# Altium PCB MAX51.PcbDoc (part 1 of 3)
Units mil, origin at the board's own origin, x right, y up, seen from the top; angles counter-clockwise.
Board outline 4625 x 3470 mil, 2 copper layers (Top Layer, Bottom Layer); 152 components, 205 nets, 817 pads, 224 vias.
Unrouted connection lines stored in the file: 41.
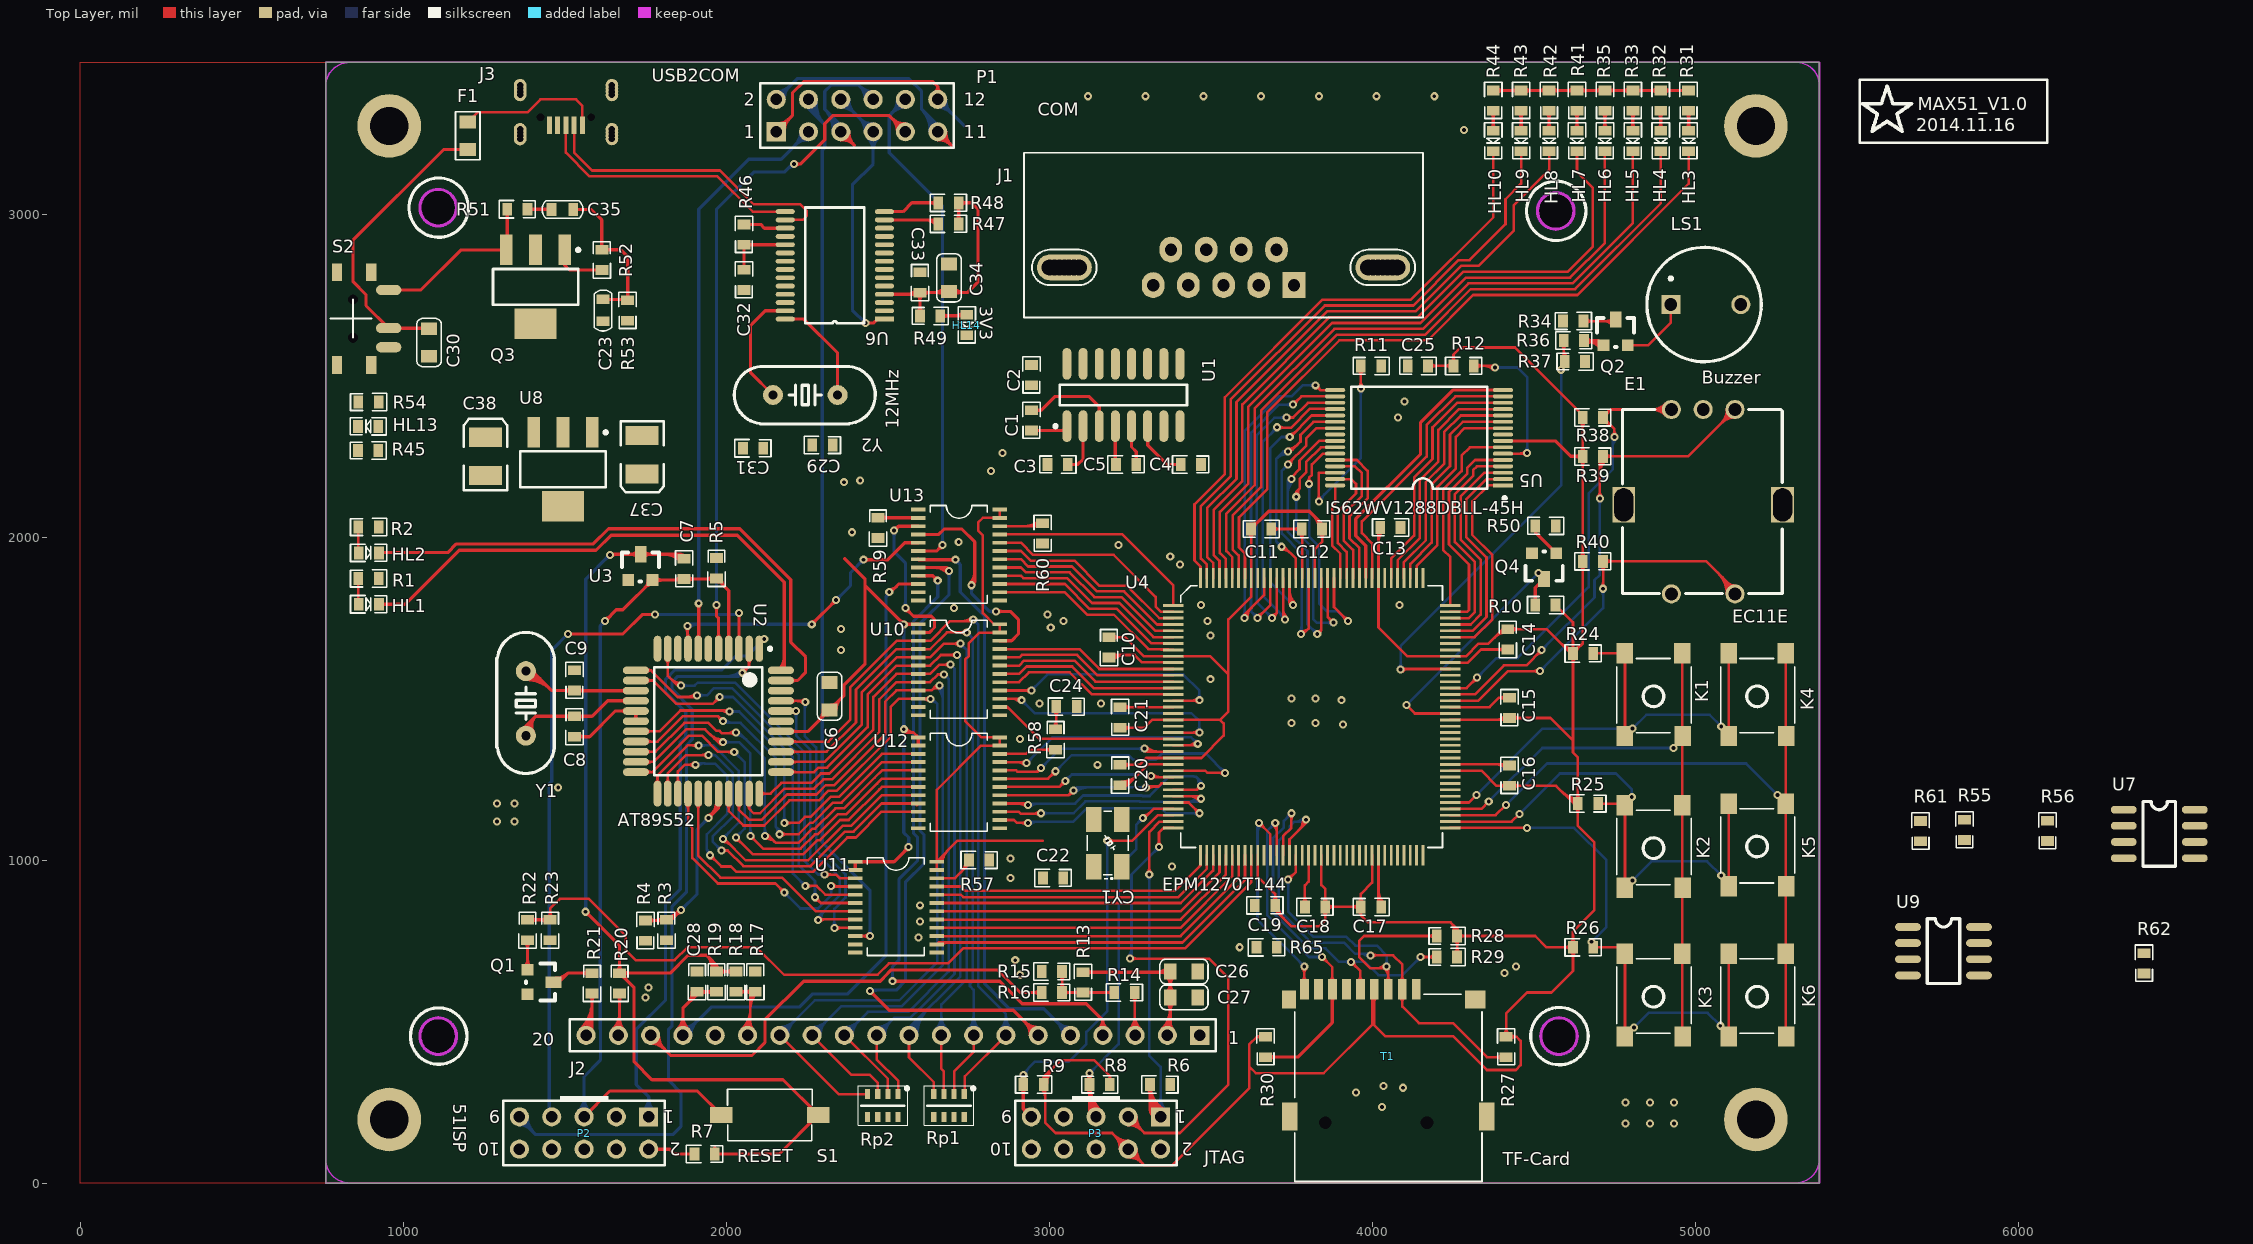
[diagram p0: Top Layer view]
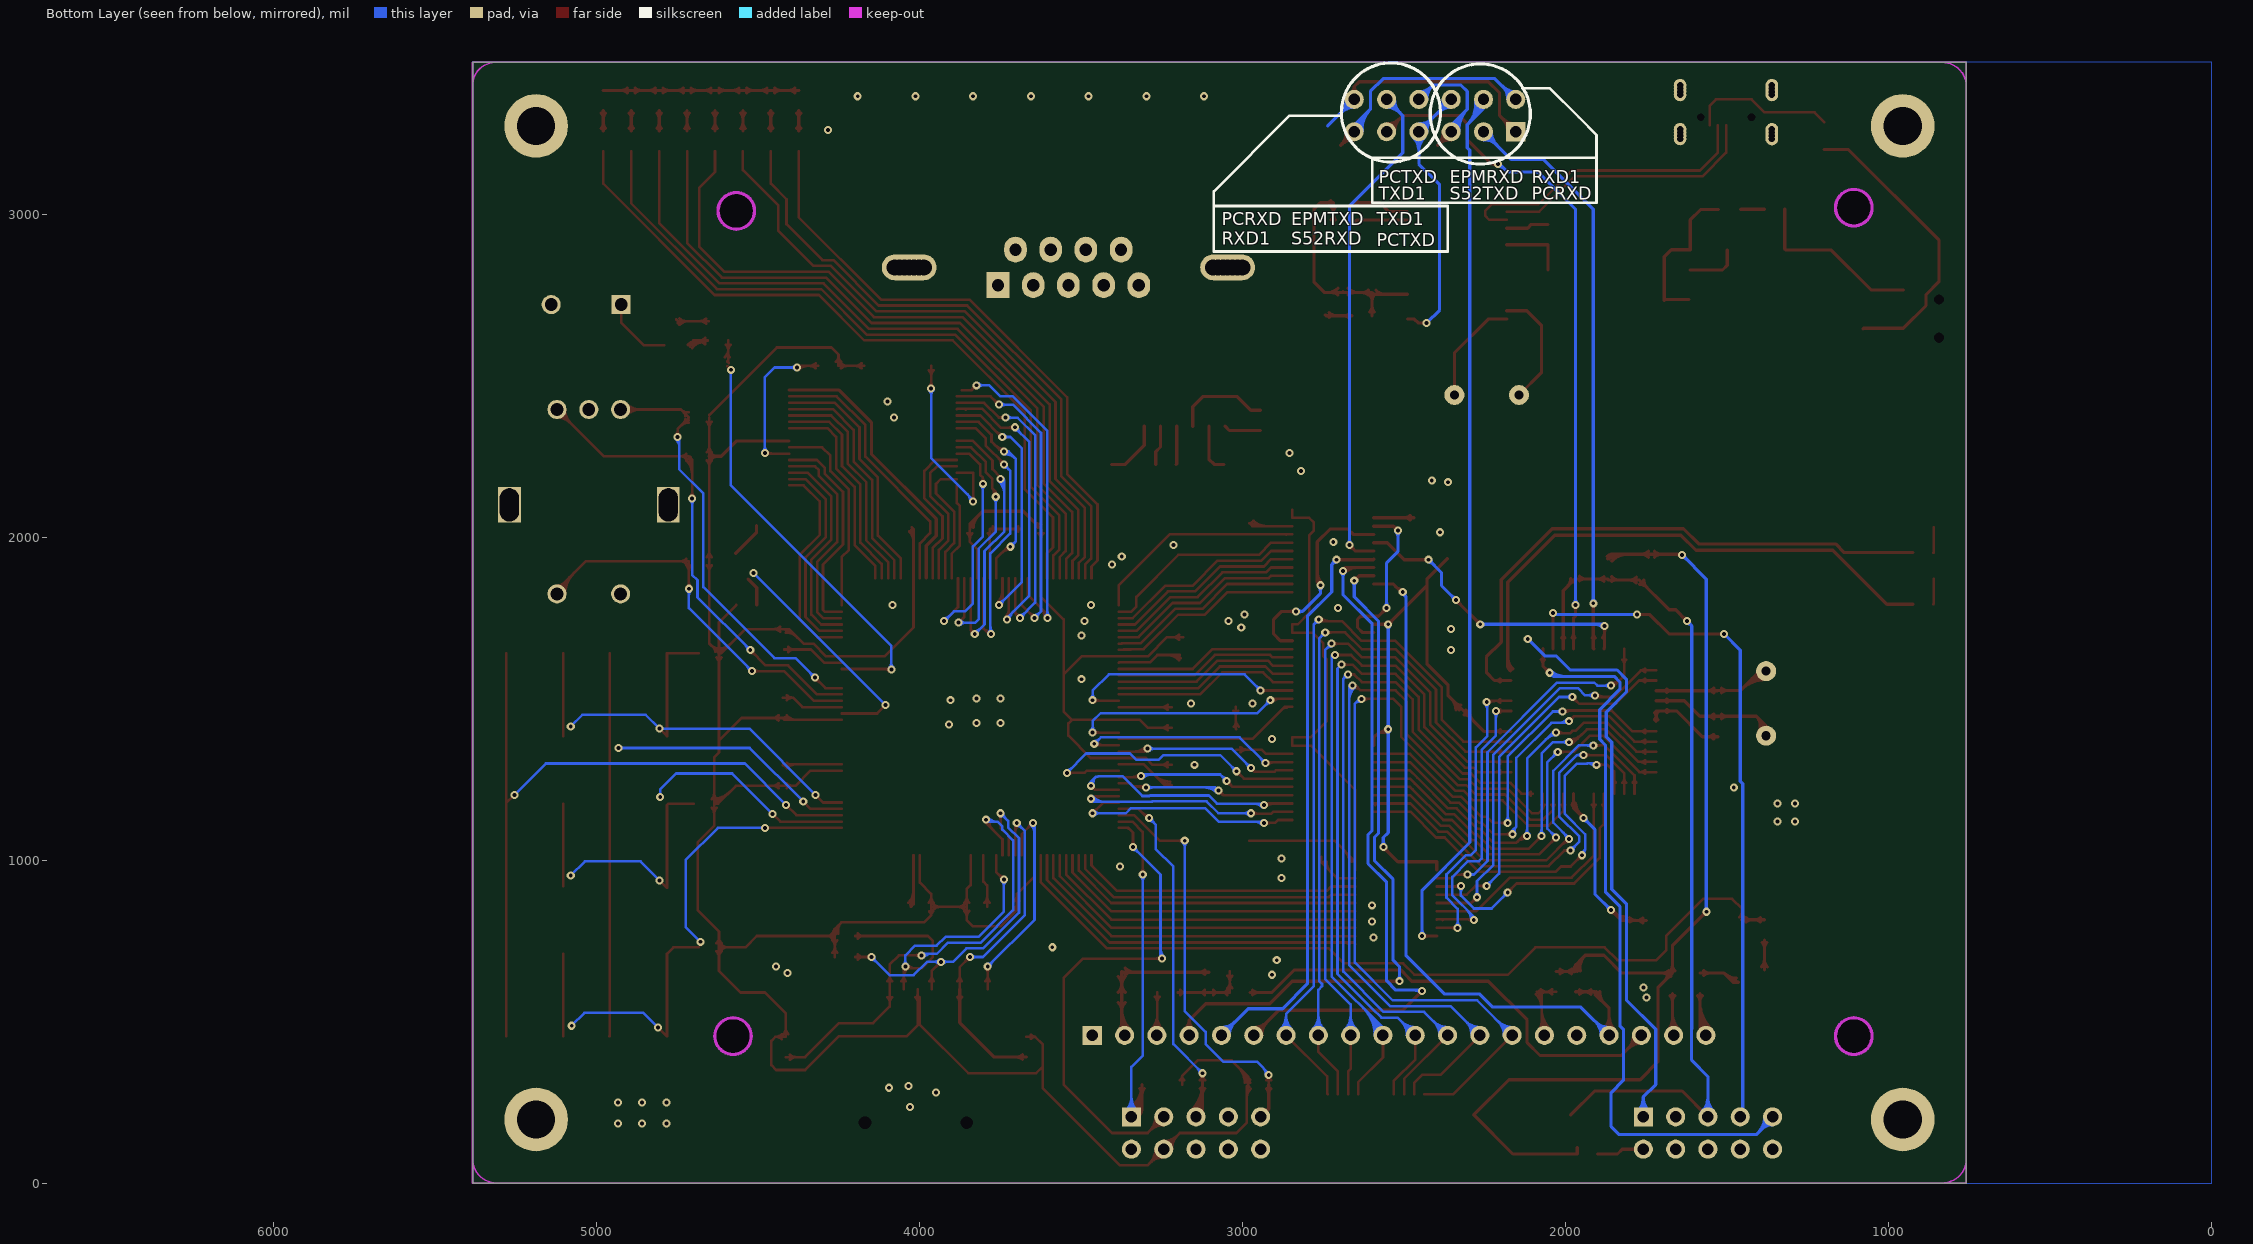
[diagram p1: Bottom Layer view, seen from below]
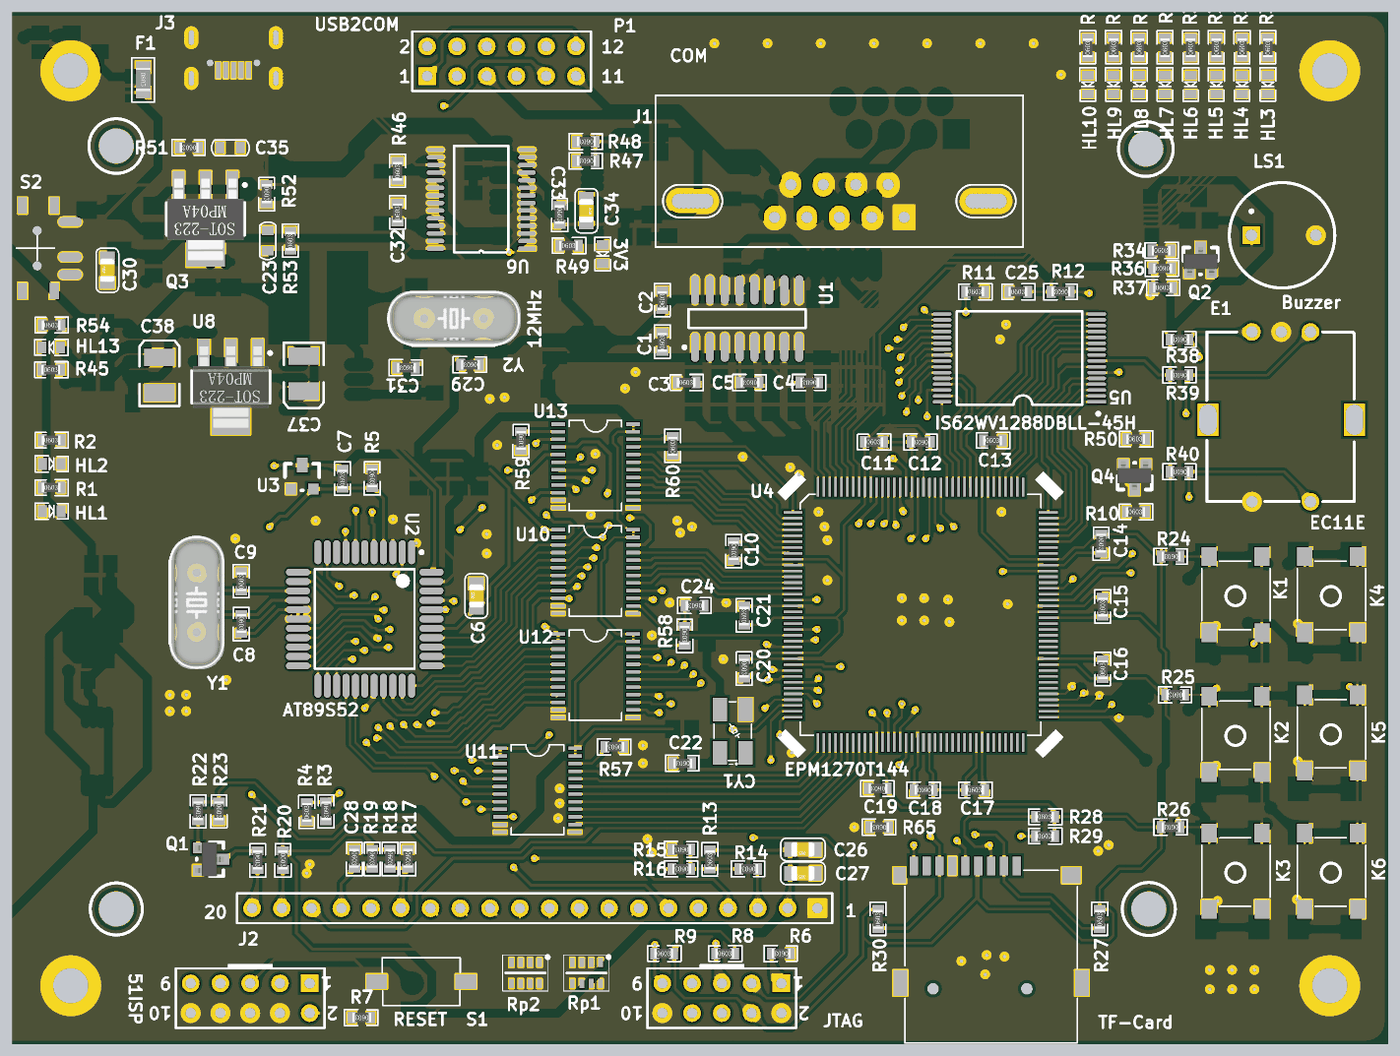
[diagram p4: 3D render of the assembled board from above, using the file's embedded part models]

## Layer stack, top to bottom
Top Layer: signal copper 1.4
Dielectric: dielectric 12.6, FR-4, Dk 4.8
Bottom Layer: signal copper 1.4

## Board outline
760,0 760,3470 5385,3470 5385,0

## Design rules (kind name [scope] priority, off if disabled: settings)
Clearance Clearance_4 [InComponent('J3')] p1: gap=7.87
Clearance Clearance_3 [InComponent('Q3')] p2: gap=7
Clearance Clearance_2 [InComponent('U5')] p3: gap=7
Clearance Clearance_1 [InComponent('U2')] p4: gap=7
Clearance [All] p5: gap=10
ComponentClearance ComponentClearance_1 [InComponent('J2')] p1: gap=0 collisioncheckmode=3 verticalgap=0 showdistances=FALSE
ComponentClearance [All] p2: gap=10 collisioncheckmode=3 verticalgap=10 showdistances=FALSE
DiffPairsRouting [All] p1: maxlimit=10 minlimit=10 mostfreqgap=10 maxuncoupledlength=500
PolygonConnect PolygonConnect_1 [InNet('GND') vs InNet('GND')] p1: connectstyle=Direct reliefconductorwidth=10 reliefentries=4 polygonreliefangle="90 Angle"
PolygonConnect [All] p2: connectstyle=Relief reliefconductorwidth=10 reliefentries=4 polygonreliefangle="90 Angle"
RoutingVias [All] p1: holewidth=15 width=25 viastyle="Through Hole" minholewidth=12 minwidth=20 maxholewidth=28 maxwidth=50
SilkscreenOverComponentPads [All] p1: minsilkscreentomaskgap=10
SolderMaskExpansion [All] p1: expansion=4
Width [All] p1: maxlimit=20 minlimit=8 preferedwidth=10
25 further rules are at their usual default settings.

## Classes and differential pairs
component class EEPROM: R55 R56 R61 R62 U7 U9
component class POWER: C23 C29 C30 C31 C32 C33 C34 C35 C37 C38 F1 HL13 HL14 J3 Q3 R45 R46 R47 R48 R49 R51 R52 R53 R54 S2 U6 U8 Y2
component class Transceiver: R57 R58 R59 R60 U10 U11 U12 U13
net class V3_AD[7..0]: V3_AD0 V3_AD1 V3_AD2 V3_AD3 V3_AD4 V3_AD5 V3_AD6 V3_AD7
net class V3_A[15..8]: V3_A8 V3_A9 V3_A10 V3_A11 V3_A12 V3_A13 V3_A14 V3_A15
net class DATA[7..0]: DATA0 DATA1 DATA2 DATA3 DATA4 DATA5 DATA6 DATA7
net class ADDR[16..0]: ADDR0 ADDR1 ADDR2 ADDR3 ADDR4 ADDR5 ADDR6 ADDR7 ADDR8 ADDR9 ADDR10 ADDR11 ADDR12 ADDR13 ADDR14 ADDR15 ADDR16
net class AD[7..0]: AD0 AD1 AD2 AD3 AD4 AD5 AD6 AD7
net class A[15..8]: A8 A9 A10 A11 A12 A13 A14 A15
component class SRAM: C25 R11 R12 U5
component class MCU: C1 C2 C3 C4 C5 C6 C7 C8 C9 HL1 HL2 J1 P1 P2 R1 R2 R3 R4 R5 R7 S1 U1 U2 U3 Y1
component class LCM12864&&JM320240: C26 C27 C28 J2 Q1 R13 R14 R15 R16 R17 R18 R19 R20 R21 R22 R23 Rp1 Rp2
component class KEY&&SD: E1 HL3 HL4 HL5 HL6 HL7 HL8 HL9 HL10 K1 K2 K3 K4 K5 K6 LS1 Q2 R24 R25 R26 R27 R28 R29 R30 R31 R32 R33 R34 R35 R36 R37 R38 R39 R40 R41 R42 R43 R44 R65 T1
component class EPM1270: C10 C11 C12 C13 C14 C15 C16 C17 C18 C19 C20 C21 C22 C24 CY1 P3 Q4 R6 R8 R9 R10 R50 U4
net class NLED[8..1]: NLED1 NLED2 NLED3 NLED4 NLED5 NLED6 NLED7 NLED8
differential pair D: +D_P -D_N

## Components (designator, comment, footprint, x,y, rotation, side; value= is the part's Value field where it differs from the comment)
C1 "100nF" R0603 2945,2330 r90 top
C2 "100nF" R0603 2945,2470 r90 top
C3 "100nF" R0603 2995,2225 r0 top
C4 "100nF" R0603 3470,2225 r180 top
C5 "100nF" R0603 3270,2225 r180 top
C6 "10uF/16V" C0805 2320,1465 r90 top
C7 "100nF" R0603 1870,1870 r90 top
C8 "30pF" R0603 1530,1445 r270 top
C9 "30pF" R0603 1530,1525 r90 top
C10 "100nF" R0603 3185,1690 r270 top
C11 "100nF" R0603 3625,2025 r0 top
C12 "100nF" R0603 3845,2025 r180 top
C13 "100nF" R0603 4025,2030 r0 top
C14 "100nF" R0603 4420,1715 r270 top
C15 "100nF" R0603 4425,1440 r90 top
C16 "100nF" R0603 4425,1230 r90 top
C17 "100nF" R0603 3965,855 r0 top
C18 "100nF" R0603 3855,855 r180 top
C19 "100nF" R0603 3700,860 r180 top
C20 "100nF" R0603 3220,1295 r270 top
C21 "100nF" R0603 3220,1410 r90 top
C22 "100nF" R0603 3044,945 r180 top
C23 "100nF" C0603 1615,2735 r270 top
C24 "100nF" R0603 3085,1475 r180 top
C25 "100nF" R0603 4110,2530 r0 top
C26 "22uF/25V" C0805 3460,655 r180 top
C27 "22uF/25V" C0805 3460,575 r180 top
C28 "100nF" R0603 1910,655 r270 top
C29 "20P" R0603 2330,2285 r180 top
C30 "1uF/16V" C0805 1080,2560 r90 top
C31 "20P" R0603 2115,2275 r180 top
C32 "100nF" R0603 2055,2765 r90 top
C33 "100nF" R0603 2600,2820 r270 top
C34 "100nF" C0805 2690,2845 r270 top
C35 "1uF" C0603 1460,3010 r0 top
C37 "22uf/6.3V" B-3528 1740,2255 r270 top
C38 "10uf/6.3V" B-3528 1255,2250 r90 top
CY1 "40MHz" XCY4_5032 3225,980 r90 top
E1 "EC11E" EC11E 5025,2395 r180 top
F1 "Fuse 1" R0805 1200,3285 r270 top
HL1 "LED" LED_0603 925,1792 r180 top
HL2 "LED" LED_0603 925,1951.33 r180 top
HL3 "LED" LED_0603 4980,3195 r90 top
HL4 "LED" LED_0603 4893.57,3195 r90 top
HL5 "LED" LED_0603 4807.14,3195 r90 top
HL6 "LED" LED_0603 4720.71,3195 r90 top
HL7 "LED" LED_0603 4634.29,3195 r90 top
HL8 "LED" LED_0603 4547.86,3195 r90 top
HL9 "LED" LED_0603 4461.43,3195 r90 top
HL10 "LED" LED_0603 4375,3195 r90 top
HL13 "LED" LED_0603 860,2343 r0 top
HL14 "LED" LED_0603 2745,2625 r90 top
J1 "DB9M" DB9/M 3540,2780 r0 top
J2 "LCM12864" LCD12864 1015,3115 r0 top locked
J3 "Micro-B USB" "Micro-B  USB1" 1555,3275 r180 top locked
K1 "KEY" KEY3 4961,1384 r90 top
K2 "KEY" KEY3 4961,914 r90 top
K3 "KEY" KEY3 4961,454 r90 top
K4 "KEY" KEY3 5282,1384 r90 top
K5 "KEY" KEY3 5282,919 r90 top
K6 "KEY" KEY3 5282,454 r90 top
LS1 "Speaker" SPK1 4925,2720 r0 top locked
P1 "Header 6X2" HDR2X6 2155,3255 r0 top locked
P2 "USP_ISP" HDR2X5 1760,205 r180 top locked
P3 "Header 5X2" HDR2X5 3345,205 r180 top locked
Q1 "MMBT3904W" SOT_23 1385,660 r270 top
Q2 "MMBT3904W" SOT_23 4716.22,2593.78 r0 top
Q3 "NTF2955" NTF2955 1410,2775 r270 top
Q4 "MMBT3904W" SOT_23 4570,1950 r180 top
R1 "10k" R0603 861,1871.67 r0 top
R2 "10k" R0603 861,2031 r0 top
R3 "10k" R0603 1815,815 r270 top
R4 "10k" R0603 1750,750 r90 top
R5 "10k" R0603 1970,1935 r270 top
R6 "10k" R0603 3375,305 r180 top
R7 "0R" R0603 1965,90 r180 top
R8 "10k" R0603 3125,305 r0 top
R9 "10k" R0603 2920,305 r0 top
R10 "10k" R0603 4505,1790 r0 top
R11 "4k7" R0603 3965,2530 r0 top
R12 "4k7" R0603 4315,2530 r180 top
R13 "4k7" R0603 3105,590 r90 top
R14 "4k7" R0603 3265,590 r180 top
R15 "4k7" R0603 3040,655 r180 top
R16 "4k7" R0603 3040,590 r180 top
R17 "4k7" R0603 2090,655 r270 top
R18 "4k7" R0603 2030,655 r270 top
R19 "4k7" R0603 1970,655 r270 top
R20 "0R" R0603 1670,650 r270 top
R21 "1k" R0603 1585,650 r270 top
R22 "4k7" R0603 1385,815 r270 top
R23 "4k7" R0603 1455,815 r270 top
R24 "10k" R0603 4685,1640 r180 top
R25 "10k" R0603 4700,1175 r180 top
R26 "10k" R0603 4685,730 r180 top
R27 "10k" R0603 4415,390 r90 top
R28 "10k" R0603 4200,765 r0 top
R29 "10k" R0603 4200,700 r0 top
R30 "10k" R0603 3670,390 r90 top
R31 "10k" R0603 4980,3320 r90 top
R32 "10k" R0603 4893.57,3320 r90 top
R33 "10k" R0603 4807.14,3320 r90 top
R34 "120R" R0603 4591.22,2668.78 r0 top
R35 "10k" R0603 4720.71,3320 r90 top
R36 "4k7" R0603 4656.22,2608.78 r180 top
R37 "4k7" R0603 4596.22,2543.78 r0 top
R38 "10k" R0603 4715,2370 r180 top
R39 "10k" R0603 4715,2250 r180 top
R40 "10k" R0603 4715,1925 r180 top
R41 "10k" R0603 4634.29,3320 r90 top
R42 "10k" R0603 4547.86,3320 r90 top
R43 "10k" R0603 4461.43,3320 r90 top
R44 "10k" R0603 4375,3320 r90 top
R45 "4k7" R0603 860,2268 r0 top
R46 "10k" R0603 2055,2905 r90 top
R47 "10k" R0603 2720,2970 r180 top
R48 "10k" R0603 2720,3035 r180 top
R49 "4k7" R0603 2600,2685 r0 top
R50 "10k" R0603 4505.5,2035 r0 top
R51 "100R" R0603 1385,3015 r180 top
R52 "10R" R0603 1615,2890 r270 top
R53 "4K7" R0603 1695,2670 r90 top
R54 "10k" R0603 861,2418 r0 top
R55 "10K" R0603 5834,1062 r90 top
R56 "10K" R0603 6091,1059 r90 top
R57 "4k7" R0603 2815,1000 r180 top
R58 "4k7" R0603 3020,1405 r270 top
R59 "0R" R0603 2470,2060 r270 top
R60 "4k7" R0603 2980,1980 r90 top
R61 "10K" R0603 5698,1058 r90 top
R62 "10K" R0603 6390,649 r90 top
R65 "10k" R0603 3705,730 r180 top
Rp1 "Res Pack4" 0603X4 2690,240 r270 top
Rp2 "Res Pack4" 0603X4 2485,240 r270 top
S1 "SW-SPST" K1 2150,195 r180 top
S2 "SW-SPDT" SW_SPDT 955,2765 r270 top locked
T1 "T-Flash" Micro-SD 4050,600 r0 top locked
U1 "MAX232A" NSO16_M 3230,2440 r90 top
U2 "AT89S52" AT89S52-TQFP44 1945,1430 r270 top locked
U3 "MAX810R" MAX810R-SOT23 1740,1905 r90 top
U4 "EPM1270T144" EPM1270T144-TQFP 3840,1435 r0 top locked
U5 "IS62WV1288DBLL-45H" STSOP32 4405,2160 r180 top locked
U6 "PL2303TA" SSOP28 2490,2675 r180 top
U7 "AT24C02D" SOP8 6327,1156 r0 top
U8 "AMS1117-3V3" SOT-223 1495,2210 r270 top
U9 "W25X20CLSN" SOP8 5659,793 r0 top
U10 "SN74LVC4245A" TSSOP-24 2595,1730 r0 top locked
U11 "SN74LVC4245A" TSSOP-24 2400,995 r0 top locked
U12 "SN74LVC4245A" TSSOP-24 2595,1380 r0 top
U13 "SN74LVC4245A" TSSOP-24 2595,2085 r0 top locked
Y1 "18.432MHz" XTAL 1380,1585 r270 top
Y2 "12MHz" XTAL 2145,2440 r0 top

## Footprints (in the part's own frame and the unit in brackets; to place one, negate y for a bottom-side part, rotate by r counter-clockwise, add the part's x,y. Pads: shape width x height; smd on the part's side, far side on the other; paste and mask are expansions set on the pad)
0603X4 [mm]
  rect 0.8x0.4 smd: 1(-0.9,1.2) 2(-0.9,0.4) 3(-0.9,-0.4) 4(-0.9,-1.2) 5(0.9,-1.2) 6(0.9,-0.4) 7(0.9,0.4) 8(0.9,1.2)
  silkscreen extent -1.55,-1.95 1.55,2.02
AT89S52-TQFP44 [mm]
  oval 2.05x0.6 smd: 1(-5.7,4) 2(-5.7,3.2) 3(-5.7,2.4) 4(-5.7,1.6) 5(-5.7,0.8) 6(-5.7,0) 7(-5.7,-0.8) 8(-5.7,-1.6) 9(-5.7,-2.4) 10(-5.7,-3.2) 11(-5.7,-4) 23(5.7,-4) 24(5.7,-3.2) 25(5.7,-2.4) 26(5.7,-1.6) 27(5.7,-0.8) 28(5.7,0) 29(5.7,0.8) 30(5.7,1.6) 31(5.7,2.4) 32(5.7,3.2) 33(5.7,4)
  oval 0.6x2.05 smd: 12(-4,-5.7) 13(-3.2,-5.7) 14(-2.4,-5.7) 15(-1.6,-5.7) 16(-0.8,-5.7) 17(0,-5.7) 18(0.8,-5.7) 19(1.6,-5.7) 20(2.4,-5.7) 21(3.2,-5.7) 22(4,-5.7) 34(4,5.7) 35(3.2,5.7) 36(2.4,5.7) 37(1.6,5.7) 38(0.8,5.7) 39(0,5.7) 40(-0.8,5.7) 41(-1.6,5.7) 42(-2.4,5.7) 43(-3.2,5.7) 44(-4,5.7)
  silkscreen extent -5.82,-4.25 4.25,4.98, body extent -5,-5 5,5, height 1.2
B-3528 [mm]
  rect 1.5x2.6 smd: 1(1.5,0) 2(-1.5,0)
  silkscreen extent -2.65,-1.7 2.95,1.7
C0603 [mil]
  rect 30x40 smd: 1(-1,4) 2(67,4)
  silkscreen extent -30,-23 97,31
C0805 [mil]
  rect 40x50 smd: 1(0,0) 2(85,0)
  silkscreen extent -32,-38 117,38, body extent 3,-25 82,25, height 30
DB9/M [mil]
  round 50 hole 50: 0(-538,55) 0(-523,55) 0(-508,55) 0(-493,55) 0(-478,55) 0(-463,55) 0(-448,55) 0(448,55) 0(463,55) 0(478,55) 0(493,55) 0(508,55) 0(523,55) 0(538,55)
  oval 170x80 hole 50: 0(-493,55) 0(493,55)
  rect 70x80 hole 38: 1(218,0)
  oval 70x80 hole 38: 2(109,0) 3(0,0) 4(-109,0) 5(-218,0) 6(164,110) 7(55,110) 8(-54,110) 9(-163,110)
  silkscreen extent -618,-100 618,410, body extent -618,-100 618,410, height 394
EC11E [mm] "Decoder"
  rect 1.8x2.8 hole 1.5 slot 2.6 at 90 deg: 0(-6.25,7.5) 0(6.25,7.5)
  round 1.5 hole 1: 1(-2.5,0) 2(2.5,0) 3(0,0) 4(-2.5,14.5) 5(2.5,14.5)
  silkscreen extent -6.22,0 6.35,14.48, body extent -5.33,0.76 5.33,13.72, height 20
EPM1270T144-TQFP [mm]
  rect 1x2.5 on Top Overlay rot 45: 0(-11.686,-10.771) 0(10.314,11.229)
  rect 1x2.5 on Top Overlay rot 135: 0(-11.686,11.229) 0(10.314,-10.771)
  rect 1.6x0.22 smd: 1(-11.586,8.979) 2(-11.586,8.479) 3(-11.586,7.979) 4(-11.586,7.479) 5(-11.586,6.979) 6(-11.586,6.479) 7(-11.586,5.979) 8(-11.586,5.479) 9(-11.586,4.979) 10(-11.586,4.479) 11(-11.586,3.979) 12(-11.586,3.479) 13(-11.586,2.979) 14(-11.586,2.479) 15(-11.586,1.979) 16(-11.586,1.479) 17(-11.586,0.979) 18(-11.586,0.479) 19(-11.586,-0.021) 20(-11.586,-0.521) 21(-11.586,-1.021) 22(-11.586,-1.521) 23(-11.586,-2.021) 24(-11.586,-2.521) 25(-11.586,-3.021) 26(-11.586,-3.521) 27(-11.586,-4.021) 28(-11.586,-4.521) 29(-11.586,-5.021) 30(-11.586,-5.521) 31(-11.586,-6.021) 32(-11.586,-6.521) 33(-11.586,-7.021) 34(-11.586,-7.521) 35(-11.586,-8.021) 36(-11.586,-8.521) 73(10.214,-8.521) 74(10.214,-8.021) 75(10.214,-7.521) 76(10.214,-7.021) 77(10.214,-6.521) 78(10.214,-6.021) 79(10.214,-5.521) 80(10.214,-5.021) 81(10.214,-4.521) 82(10.214,-4.021) 83(10.214,-3.521) 84(10.214,-3.021) 85(10.214,-2.521) 86(10.214,-2.021) 87(10.214,-1.521) 88(10.214,-1.021) 89(10.214,-0.521) 90(10.214,-0.021) 91(10.214,0.479) 92(10.214,0.979) 93(10.214,1.479) 94(10.214,1.979) 95(10.214,2.479) 96(10.214,2.979) 97(10.214,3.479) 98(10.214,3.979) 99(10.214,4.479) 100(10.214,4.979) 101(10.214,5.479) 102(10.214,5.979) 103(10.214,6.479) 104(10.214,6.979) 105(10.214,7.479) 106(10.214,7.979) 107(10.214,8.479) 108(10.214,8.979)
  rect 0.22x1.6 smd: 37(-9.436,-10.671) 38(-8.936,-10.671) 39(-8.436,-10.671) 40(-7.936,-10.671) 41(-7.436,-10.671) 42(-6.936,-10.671) 43(-6.436,-10.671) 44(-5.936,-10.671) 45(-5.436,-10.671) 46(-4.936,-10.671) 47(-4.436,-10.671) 48(-3.936,-10.671) 49(-3.436,-10.671) 50(-2.936,-10.671) 51(-2.436,-10.671) 52(-1.936,-10.671) 53(-1.436,-10.671) 54(-0.936,-10.671) 55(-0.436,-10.671) 56(0.064,-10.671) 57(0.564,-10.671) 58(1.064,-10.671) 59(1.564,-10.671) 60(2.064,-10.671) 61(2.564,-10.671) 62(3.064,-10.671) 63(3.564,-10.671) 64(4.064,-10.671) 65(4.564,-10.671) 66(5.064,-10.671) 67(5.564,-10.671) 68(6.064,-10.671) 69(6.564,-10.671) 70(7.064,-10.671) 71(7.564,-10.671) 72(8.064,-10.671) 109(8.064,11.129) 110(7.564,11.129) 111(7.064,11.129) 112(6.564,11.129) 113(6.064,11.129) 114(5.564,11.129) 115(5.064,11.129) 116(4.564,11.129) 117(4.064,11.129) 118(3.564,11.129) 119(3.064,11.129) 120(2.564,11.129) 121(2.064,11.129) 122(1.564,11.129) 123(1.064,11.129) 124(0.564,11.129) 125(0.064,11.129) 126(-0.436,11.129) 127(-0.936,11.129) 128(-1.436,11.129) 129(-1.936,11.129) 130(-2.436,11.129) 131(-2.936,11.129) 132(-3.436,11.129) 133(-3.936,11.129) 134(-4.436,11.129) 135(-4.936,11.129) 136(-5.436,11.129) 137(-5.936,11.129) 138(-6.436,11.129) 139(-6.936,11.129) 140(-7.436,11.129) 141(-7.936,11.129) 142(-8.436,11.129) 143(-8.936,11.129) 144(-9.436,11.129)
  silkscreen extent -10.97,-10.06 9.6,10.52, body extent -10.72,-9.93 9.47,10.39, height 3
HDR2X5 [mm] "Connector; Header; 5x2 Position"
  rect 1.5x1.5 hole 0.9: 1(0,0)
  round 1.5 hole 0.9: 2(0,2.54) 3(2.54,0) 4(2.54,2.54) 5(5.08,0) 6(5.08,2.54) 7(7.62,0) 8(7.62,2.54) 9(10.16,0) 10(10.16,2.54)
  silkscreen extent -1.27,-1.65 11.43,3.81
HDR2X6 [mm] "Connector; Header; 6x2 Position"
  rect 1.5x1.5 hole 0.9: 1(0,0)
  round 1.5 hole 0.9: 2(0,2.54) 3(2.54,0) 4(2.54,2.54) 5(5.08,0) 6(5.08,2.54) 7(7.62,0) 8(7.62,2.54) 9(10.16,0) 10(10.16,2.54) 11(12.7,0) 12(12.7,2.54)
  silkscreen extent -1.27,-1.27 13.97,3.81
K1 [mil]
  rect 70x50 smd: 1(-135,-16) 2(165,-16)
  silkscreen extent -116,-96 146,64, body extent -114,-94 143,61, height 59
KEY3 [mm] "6X6X5 mm"
  rect 1.6x1.3 smd: 1(0,0) 2(0,4.525) 3(6.5,0.025) 4(6.5,4.525)
  silkscreen extent 0.25,-0.68 6.1,5.16, body extent 0.19,-0.74 6.16,5.22, height 1
LCD12864 [mm] "Connector; Header; 20"
  round 0 hole 3: 0(2.413,-67.564) 0(2.413,-2.413) 0(90.297,-2.667) 0(90.551,-67.564)
  rect 1.5x1.5 hole 0.9: 1(62.26,-67.5)
  round 1.5 hole 0.9: 2(59.72,-67.5) 3(57.18,-67.5) 4(54.64,-67.5) 5(52.1,-67.5) 6(49.56,-67.5) 7(47.02,-67.5) 8(44.48,-67.5) 9(41.94,-67.5) 10(39.4,-67.5) 11(36.86,-67.5) 12(34.32,-67.5) 13(31.78,-67.5) 14(29.24,-67.5) 15(26.7,-67.5) 16(24.16,-67.5) 17(21.62,-67.5) 18(19.08,-67.5) 19(16.54,-67.5) 20(14,-67.5)
  silkscreen extent 0.09,-69.82 92.81,-0.08, body extent 0,-70 93,0, height 18
LED_0603 [mil]
  rect 30x40 smd: a(63,0) k(0,0)
  silkscreen extent -24,-27 88,27
MAX810R-SOT23 [mil]
  rect 36x36 smd: 1(-38,43) 2(-38,-32)
  rect 50x36 smd: 3(42,5)
  silkscreen extent -43,-52 47,63
"Micro-B  USB1" [mm] "MICRO USB 5S BРНЛ"
  round 1 hole 0.5: 0(-2.318,0.311) 0(-2.318,0.565) 0(-2.318,0.819) 0(-2.318,1.073) 0(-2.318,-3.152) 0(-2.318,-2.898) 0(-2.318,-2.644) 0(-2.318,-2.39) 0(4.9,-2.898) 0(4.9,-2.644) 0(4.9,-2.39) 0(4.9,0.318) 0(4.9,0.572) 0(4.9,0.826) 0(4.9,1.08) 0(4.9,-3.152)
  rect 0.4x1.4 smd: 1(0,0) 2(0.65,0) 3(1.3,0) 4(1.95,0) 5(2.6,0)
  round 0 hole 0.6 unplated: ""(-0.7,-0.627) ""(3.3,-0.627)
  body extent -2.32,-4.93 4.9,1.08, height 5
Micro-SD [mm] "T-Flash"
  rect 0.7x1.6 smd: 1(2.2,0) 2(1.1,0) 3(0,0) 4(-1.1,0) 5(-2.2,0) 6(-3.3,0) 7(-4.4,0) 8(-5.5,0) 9(-6.6,0)
  rect 1.1x1.4 smd: 10(-7.8,-0.8)
  rect 1.2x2.2 smd: 11(-7.75,-10) 12(7.75,-10)
  rect 1.6x1.4 smd: 13(6.85,-0.8)
  round 0 hole 1 unplated: ""(-4.95,-10.5) ""(3.05,-10.5)
  silkscreen extent -7.37,-15.11 7.37,-0.38, body extent -7.28,-15.11 7.33,-0.51, height 1
NSO16_M [mm] "SOIC, 16-Leads, Body 9.9x3.9mm, Pitch 1.27mm, IPC Low Density"
  oval 2.5x0.7 smd: 1(-2.45,4.445) 2(-2.45,3.175) 3(-2.45,1.905) 4(-2.45,0.635) 5(-2.45,-0.635) 6(-2.45,-1.905) 7(-2.45,-3.175) 8(-2.45,-4.445) 9(2.45,-4.445) 10(2.45,-3.175) 11(2.45,-1.905) 12(2.45,-0.635) 13(2.45,0.635) 14(2.45,1.905) 15(2.45,3.175) 16(2.45,4.445)
  silkscreen extent -2.57,-5 0.8,5.47, body extent -2,-5 2,5, height 1.75
NTF2955 [mm]
  rect 2.4x1 smd: D(-2.9,0) G(-2.9,2.3) S(-2.9,-2.3)
  rect 2.4x3.3 smd: Tab(2.9,0)
  silkscreen extent -3.02,-3.35 1.4,3.48, body extent -3.43,-3.25 3.53,3.25, height 1.7
R0603 [mil]
  rect 30x40 smd: 1(0,0) 2(63,0)
  silkscreen extent -24,-27 88,27, body extent -1,-16 61,16, height 18
R0805 [mil]
  rect 40x50 smd: 1(0,0) 2(85,0)
  silkscreen extent -32,-38 117,38, body extent 2,-25 80,25, height 22
SOP8 [mil]
  oval 80x24 smd: 1(0,0) 2(0,-50) 3(0,-100) 4(0,-150) 5(220,-150) 6(220,-100) 7(220,-50) 8(220,0)
  silkscreen extent 60,-175 160,25, body extent -9,-171 227,22
SOT-223 [mm]
  rect 2.4x1 smd: 1(-2.9,2.3) 2(-2.9,0) 3(-2.9,-2.3)
  rect 2.4x3.3 smd: 4(2.9,0)
  silkscreen extent -3.02,-3.35 1.4,3.48, body extent -3.48,-3.25 3.48,3.25, height 1.7
SOT_23 [mil]
  rect 36x36 smd: B(0,0) E(75,0)
  rect 36x50 smd: C(38,80)
  silkscreen extent -20,-5 95,85, body extent -19,-11 95,86, height 39
SPK1 [mm] "YMD9055     9*5.5  УР?"
  rect 1.5x1.5 hole 1: 1(0,0)
  round 1.5 hole 1: 2(5.5,0)
  silkscreen extent -1.88,-4.5 7.11,4.5, body extent -1.88,-4.59 7.08,4.39, height 10
SSOP28 [mm]
  rect 1.5x0.38 smd: 1(0,0)
  oval 1.5x0.38 smd: 2(0,-0.65) 3(0,-1.3) 4(0,-1.95) 5(0,-2.6) 6(0,-3.25) 7(0,-3.9) 8(0,-4.55) 9(0,-5.2) 10(0,-5.85) 11(0,-6.5) 12(0,-7.15) 13(0,-7.8) 14(0,-8.45) 15(7.8,-8.45) 16(7.8,-7.8) 17(7.8,-7.15) 18(7.8,-6.5) 19(7.8,-5.85) 20(7.8,-5.2) 21(7.8,-4.55) 22(7.8,-3.9) 23(7.8,-3.25) 24(7.8,-2.6) 25(7.8,-1.95) 26(7.8,-1.3) 27(7.8,-0.65) 28(7.8,0)
  silkscreen extent 1.58,-8.78 6.22,0.33, body extent 1.02,-8.64 6.86,0.13, height 1
STSOP32 [mm]
  rect 1.6x0.3 smd: 1(0,0)
  oval 1.6x0.3 smd: 2(0,-0.5) 3(0,-1) 4(0,-1.5) 5(0,-2) 6(0,-2.5) 7(0,-3) 8(0,-3.5) 9(0,-4) 10(0,-4.5) 11(0,-5) 12(0,-5.5) 13(0,-6) 14(0,-6.5) 15(0,-7) 16(0,-7.5) 17(13.2,-7.5) 18(13.2,-7) 19(13.2,-6.5) 20(13.2,-6) 21(13.2,-5.5) 22(13.2,-5) 23(13.2,-4.5) 24(13.2,-4) 25(13.2,-3.5) 26(13.2,-3) 27(13.2,-2.5) 28(13.2,-2) 29(13.2,-1.5) 30(13.2,-1) 31(13.2,-0.5) 32(13.2,0)
  silkscreen extent -0.25,-7.75 11.94,1.14, body extent 1.02,-7.75 12.19,0.38, height 1
SW_SPDT [mm]
  rect 1.4x0.8 smd: 0(-1.4,-1.364) 0(-1.4,-4.064) 0(5.9,-1.364) 0(5.9,-4.064)
  round 0 hole 0.8 unplated: 0(0.75,-2.816) 0(3.75,-2.816)
  oval 0.8x2 smd: 1(0,0) 2(3,0) 3(4.5,0)
  silkscreen extent 0.75,-4.57 3.75,-1.36, body extent -1.27,-4.57 5.84,-0.25, height 5
TSSOP-24 [mm]
  rect 1.15x0.3 smd: 1(0,0) 2(0,-0.65) 3(0,-1.3) 4(0,-1.95) 5(0,-2.6) 6(0,-3.25) 7(0,-3.9) 8(0,-4.55) 9(0,-5.2) 10(0,-5.85) 11(0,-6.5) 12(0,-7.15) 13(6.4,-7.15) 14(6.4,-6.5) 15(6.4,-5.85) 16(6.4,-5.2) 17(6.4,-4.55) 18(6.4,-3.9) 19(6.4,-3.25) 20(6.4,-2.6) 21(6.4,-1.95) 22(6.4,-1.3) 23(6.4,-0.65) 24(6.4,0)
  silkscreen extent 0.94,-7.38 5.42,0.33, body extent 0.94,-7.41 5.42,0.02, height 1
XCY4_5032 [mm]
  rect 2x1.2 smd: 1(0,0) 2(3.7,0) 3(3.7,2.2) 4(0,2.2)
  silkscreen extent -0.97,-0.5 4.35,2.7, body extent -0.66,-0.51 4.34,2.69, height 0.9
XTAL [mil]
  round 62 hole 28: 1(0,0) 2(200,0)
  silkscreen extent -120,-90 317,88, body extent -122,-90 324,93, height 146

## Part data
C1 C2 C3 C4 C5 C7 C8 C9 C10 C11 C12 C13 C14 C15 C16 C17 C18 C19 C20 C21 C22 C24 C25 C28: library part CAP_04
C6: library part CAP_A
C23 C26 C27 C30 C35: library part CAP_08
C29 C31 C32 C33 C34: library part CAP_06
C37 C38: library part CAP_B
CY1: library part XTAL_4P, "Active crystal"
E1: "encoder"
F1: "Fuse"
HL1 HL2 HL3 HL4 HL5 HL6 HL7 HL8 HL9 HL10 HL13 HL14: library part "LED 2"
J2: "ST7920/LCM12864"
LS1: "Loudspeaker"
P1: "Header, 6-Pin, Dual row"
P2: library part "Header 5X2", "Header, 5-Pin, Dual row"
P3: "Header, 5-Pin, Dual row"
Q1 Q2 Q4: library part MMBT3904TT1G
Q3: library part NTF2955-3
R1 R2 R11 R12 R13 R14 R15 R16 R17 R18 R19 R20 R21 R22 R23 R24 R25 R26 R27 R28 R29 R30 R31 R32 R33 R34 R35 R36 R37 R38 R39 R40 R41 R42 R43 R44 R57 R58 R59 R60 R65: library part RES_04
R3 R7: library part RES_04, "0402R"
R4 R5 R6 R8 R9 R10 R50: library part RES_04, "0402"
R45 R46 R47 R48 R49 R51 R52 R53 R54 R55 R56 R61 R62: library part RES_06
S1: "Single-Pole, Single-Throw Switch"
S2: "Single-Pole, Duble Throw Switch"
T1: "MICRO SD"
U1: "+5V-Powered, Multichannel RS-232 Drivers/Receivers"
U2: library part AT89S52-24U
U5: library part IS62WV1288DBLL-45TLI/TSOP-32, "128Kx8 LOW VOLTAGE,ULTRA LOW POWER SRAM"
U7: "EEPROM"
U8: library part AMS1117
U9: "2M-bit/256K Byte(262,144)"
U10 U11 U12 U13: library part SN74LVC4245A-SOIC
Y1 Y2: library part XTAL, "Passive crystal"

## Free pads (board coordinates)
  round 196.85 hole 118.11: 0(956.85,196.85) 0(956.85,3273.15) 0(5188.15,196.85) 0(5188.15,3273.15)

## Via types
v1: diameter 25, hole 12, Top Layer to Bottom Layer, 224 vias

## Nets (pads, with @x,y where several pads share a name; then routed paths per layer and width w, separated by ;. In a path a pad name is that pad's centre, name@x,y a point inside that pad or via, vN(x,y) a via of type N, cw(c..) or ccw(c..) an arc to the next point about the centre after c; other vN are vias at no path point)
3V3BLED: HL14.a R49.2 | length 159.1
  Top Layer w10: R49.2@2663,2685 2742,2685 HL14.a@2745,2688 ; R49.2@2670.07,2677.93 cw(c2687.14,2660.86) 2687.14,2685 cw(c2687.14,2709.14) R49.2@2670.07,2692.07 ; 2708.62,2685 ccw(c2708.62,2719.38) HL14.a@2732.93,2695.07 ; 2723.1,2685 cw(c2723.1,2671.1) HL14.a@2732.93,2680.93
\C\S\: R27.1 T1.2 U4.51 | length 1731.2
  Top Layer w8: U4.51@3744.1,1014.87 3744.1,1064.1 3795,1115 v1(3795,1125) ; 3773.42,1093.42 ccw(c3741.84,1125) v1@3786.5,1125 ; 3787.08,1107.08 ccw(c3769.15,1125) v1@3794.5,1125 ; v1(3995,705) 4065,705 4093.31,676.69 T1.2@4093.31,600 4093.31,546.69 4145,495 4250,495 4355,390 R27.1@4415,390 ; v1@4001.01,698.99 cw(c4015.52,684.48) 4015.52,705 cw(c4015.52,725.52) v1@4001.01,711.01 ; T1.2@4086.39,575.37 cw(c4069.7,558.67) 4093.31,558.67 cw(c4116.92,558.67) T1.2@4100.22,575.37 ; T1.2@4086.39,624.63 ccw(c4069.7,641.33) 4093.31,641.33 ccw(c4116.92,641.33) T1.2@4100.22,624.63 ; R27.1@4402.22,382.22 ccw(c4383.44,363.44) 4383.44,390 ccw(c4383.44,416.56) R27.1@4402.22,397.78
  Bottom Layer w8: 3758.79,1118.5 ccw(c3758.79,1161.21) v1@3788.99,1131.01 ; 3778.1,1118.5 ccw(c3778.1,1141.9) v1@3794.65,1125.35 ; v1(3795,1125) 3788.5,1118.5 3758.5,1118.5 3744.5,1104.5 3744.5,1094.04 3711,1060.54 3711,844.91 3811.41,744.5 3912.98,744.5 3947.48,710 3990,710 v1(3995,705) ; 3962.41,710 cw(c3962.41,672.41) v1@3988.99,698.99 ; 3981.72,710 cw(c3981.72,691.72) v1@3994.65,704.65
A8: U2.18 U12.3 | length 1412.5
  Top Layer w8: U2.18@1720.59,1398.5 1793.5,1398.5 1858,1463 2007,1463 v1(2010,1460) ; U2.18@1754.66,1392.98 cw(c1767.99,1379.65) 1767.99,1398.5 cw(c1767.99,1417.36) U2.18@1754.66,1404.03 ; 1982.24,1463 cw(c1982.24,1432.24) v1@2003.99,1453.99 ; 1996.72,1463 ccw(c1996.72,1473.28) v1@2003.99,1466.01 ; v1(2180,1115) 2225,1115 2243.59,1133.59 2260.86,1133.59 2323.28,1196.02 2349.66,1196.02 2482.47,1328.82 U12.3@2595,1328.82 ; v1@2186.01,1108.99 cw(c2200.52,1094.48) 2200.52,1115 cw(c2200.52,1135.52) v1@2186.01,1121.01
  Bottom Layer w8: v1(2010,1460) 2040,1460 2180,1320 v1(2180,1115) ; v1@2016.01,1453.99 cw(c2030.52,1439.48) 2030.52,1460 cw(c2030.52,1480.52) v1@2016.01,1466.01 ; v1@2173.99,1121.01 ccw(c2159.48,1135.52) 2180,1135.52 ccw(c2200.52,1135.52) v1@2186.01,1121.01
A9: U2.19 U12.4 | length 1479.5
  Top Layer w8: U2.19@1720.59,1367.01 1787.46,1367.01 1865.46,1445 1975,1445 v1@1995,1425 ; U2.19@1754.66,1361.48 cw(c1767.99,1348.15) 1767.99,1367.01 cw(c1767.99,1385.87) U2.19@1754.66,1372.53 ; v1@1981.5,1430 ccw(c1960.98,1430) 1975.49,1444.51 ccw(c1990,1459.02) v1@1990,1438.5 ; v1(2165,1080) 2224.41,1080 2260,1115.59 2268.31,1115.59 2330.74,1178.02 2357.12,1178.02 2482.33,1303.23 U12.4@2595,1303.23 U12.4@2594.09,1302.32 ; v1@2171.01,1073.99 cw(c2185.52,1059.48) 2185.52,1080 cw(c2185.52,1100.52) v1@2171.01,1086.01
  Bottom Layer w8: v1(1990,1430) 1995,1425 2045,1425 2153.5,1316.5 2153.5,1104.02 ; v1@1990.35,1430.35 ccw(c2003.28,1443.28) 2003.28,1425 ; v1@1996.01,1436.01 ccw(c2022.59,1462.59) 2022.59,1425 ; v1@2157.25,1083.5 ccw(c2140.52,1091.04) 2153.5,1104.02 ; 2161.69,1095.84 cw(c2151.81,1085.95) v1@2164.54,1080.21 ; v1@2161.86,1087.9 ccw(c2160.02,1092.52) 2165,1092.52 ; v1(2165,1080) 2165,1092.52 ; v1@2168.14,1087.9 cw(c2169.98,1092.52) 2165,1092.52 ; 2153.5,1104.02 2165,1092.52
A10: U2.20 U12.5 | length 1535
  Top Layer w8: U2.20@1720.59,1335.51 1781.42,1335.51 1870.91,1425 1945,1425 1970,1400 1980,1400 1987.5,1392.5 2017.5,1392.5 ; U2.20@1754.66,1329.99 cw(c1767.99,1316.65) 1767.99,1335.51 cw(c1767.99,1354.37) U2.20@1754.66,1341.04 ; 2003.44,1392.5 ccw(c2003.44,1421.56) v1@2023.99,1401.01 ; 2015.51,1392.5 cw(c2015.51,1380.51) v1@2023.99,1388.99 ; v1@2021.57,1396.08 cw(c2017.5,1396.6) 2017.5,1392.5 ; v1@2023.37,1389.68 ccw(c2017.5,1384.98) 2017.5,1392.5 ; v1(2030,1395) 2020,1395 2017.5,1392.5 ; v1@2120.02,1074.5 cw(c2121.35,1046.42) 2141.23,1066.3 ; v1(2120,1075) 2132.52,1075 ; v1@2120.4,1066.51 cw(c2122.5,1021.98) 2154.02,1053.5 ; v1@2127.9,1071.86 cw(c2132.52,1070.02) 2132.52,1075 ; v1@2127.9,1078.14 ccw(c2132.52,1079.98) 2132.52,1075 ; U12.5@2595,1277.64 2482.64,1277.64 2459.87,1254.87 2459.42,1254.87 2364.57,1160.02 2338.19,1160.02 2275.77,1097.59 2267.46,1097.59 2223.37,1053.5 2154.02,1053.5 ; 2132.52,1075 2154.02,1053.5
  Bottom Layer w8: v1@2030,1386.5 cw(c2030,1341.84) 2061.58,1373.42 ; v1@2030,1394.5 cw(c2030,1369.15) 2047.92,1387.08 ; v1(2030,1395) 2040,1395 2120,1315 v1(2120,1075) ; v1@2113.99,1081.01 ccw(c2099.48,1095.52) 2120,1095.52 ccw(c2140.52,1095.52) v1@2126.01,1081.01
A11: U2.21 U12.6 | length 1541.4
  Top Layer w8: U2.21@1720.59,1304.02 1775.38,1304.02 1876.37,1405 1935,1405 1975,1365 ; U2.21@1754.66,1298.49 cw(c1767.99,1285.16) 1767.99,1304.02 cw(c1767.99,1322.87) U2.21@1754.66,1309.54 ; 1949.88,1390.12 ccw(c1990,1430.23) v1@1990,1373.5 ; 1963.54,1376.46 ccw(c1990,1402.92) v1@1990,1365.5 ; 1977.2,1362.8 ccw(c1990,1375.61) v1@1990,1357.5 ; v1@1982.71,1360.63 ccw(c1975,1356.02) 1975,1365 ; v1@1982.71,1369.37 cw(c1975,1373.98) 1975,1365 ; v1(1990,1365) 1975,1365 ; v1@2075,1066.5 cw(c2075,1045.98) 2089.51,1060.49 cw(c2104.02,1075) v1@2083.5,1075 ; v1(2075,1075) 2114.5,1035.5 2230.82,1035.5 2274.91,1079.59 2283.22,1079.59 2345.65,1142.02 2372.03,1142.02 2466.88,1236.87 2467.32,1236.87 2482.5,1252.05 U12.6@2595,1252.05
  Bottom Layer w8: v1(1990,1365) 2040,1365 2075,1330 v1(2075,1075) ; v1@1996.01,1358.99 cw(c2010.52,1344.48) 2010.52,1365 cw(c2010.52,1385.52) v1@1996.01,1371.01 ; v1@2068.99,1081.01 ccw(c2054.48,1095.52) 2075,1095.52 ccw(c2095.52,1095.52) v1@2081.01,1081.01
A12: U2.22 U12.7 | length 1493
  Top Layer w8: U2.22@1720.59,1272.52 1772.52,1272.52 1885,1385 1925,1385 1975,1335 v1(2025,1335) ; U2.22@1754.66,1267 cw(c1767.99,1253.66) 1767.99,1272.52 cw(c1767.99,1291.38) U2.22@1754.66,1278.04 ; v1@2018.99,1328.99 ccw(c2004.48,1314.48) 2004.48,1335 ccw(c2004.48,1355.52) v1@2018.99,1341.01 ; v1@2030,1061.5 cw(c2030,1040.98) 2044.51,1055.49 cw(c2059.02,1070) v1@2038.5,1070 ; v1(2030,1070) 2082.5,1017.5 2238.28,1017.5 2282.37,1061.59 2290.68,1061.59 2353.1,1124.02 2379.49,1124.02 2474.34,1218.87 2474.78,1218.87 2482.37,1226.46 U12.7@2595,1226.46
  Bottom Layer w8: v1@2025,1326.5 cw(c2025,1305.98) 2039.51,1320.49 cw(c2054.02,1335) v1@2033.5,1335 ; v1(2025,1335) 2057,1303 2057,1097 v1(2030,1070) ; v1@2030,1078.5 ccw(c2030,1099.02) 2044.51,1084.51 ccw(c2059.02,1070) v1@2038.5,1070
A13: U2.23 U12.8 | length 1478.2
  Top Layer w8: U2.23@1782,1239.66 ccw(c1768.66,1252.99) 1787.52,1252.99 ccw(c1806.38,1252.99) U2.23@1793.04,1239.66 ; U2.23@1787.52,1205.59 1787.52,1262.06 1880.46,1355 v1(1915,1355) ; v1@1908.99,1348.99 ccw(c1894.48,1334.48) 1894.48,1355 ccw(c1894.48,1375.52) v1@1908.99,1361.01 ; v1@1990,1056.5 cw(c1990,1023.91) 2013.05,1046.95 ; v1(1990,1065) 1995,1065 2060.5,999.5 2254.04,999.5 2360.56,1106.02 2386.94,1106.02 2481.79,1200.87 U12.8@2595,1200.87
  Bottom Layer w8: v1(1915,1355) 1960.46,1355 2039,1276.46 2039,1116.48 1990,1067.48 v1(1990,1065) ; v1@1921.01,1348.99 cw(c1935.52,1334.48) 1935.52,1355 cw(c1935.52,1375.52) v1@1921.01,1361.01 ; v1@1990,1073.5 ccw(c1990,1088.04) 2000.28,1077.76 ; v1@1998.5,1065 cw(c2025,1065) 2006.26,1083.74
A14: U2.24 U12.9 | length 1459.6
  Top Layer w8: U2.24@1813.49,1239.66 ccw(c1800.16,1252.99) 1819.02,1252.99 ccw(c1837.87,1252.99) U2.24@1824.54,1239.66 ; U2.24@1819.02,1205.59 1819.02,1268.1 1875.91,1325 v1(1945,1325) ; v1@1938.99,1318.99 ccw(c1924.48,1304.48) 1924.48,1325 ccw(c1924.48,1345.52) v1@1938.99,1331.01 ; v1(1985,1030) 2004.54,1030 ; v1@1991.22,1024.2 cw(c2004.54,1011.78) 2004.54,1030 ; v1@1991.22,1035.8 ccw(c2004.54,1048.22) 2004.54,1030 ; U12.9@2590.22,1170.5 U12.9@2595,1175.28 2481.66,1175.28 2394.4,1088.02 2368.02,1088.02 2261.5,981.5 2053.04,981.5 2004.54,1030
  Bottom Layer w8: v1(1945,1325) 1965,1325 ; v1@1951.12,1319.1 cw(c1965,1305.72) 1965,1325 ; v1@1951.12,1330.9 ccw(c1965,1344.28) 1965,1325 ; v1@1976.5,1030 ccw(c1955.98,1030) 1970.49,1044.51 ccw(c1985,1059.02) v1@1985,1038.5 ; v1(1985,1030) 1958,1057 1958,1072.54 2021,1135.54 2021,1269 1965,1325
A15: U2.25 U12.10 | length 1401
  Top Layer w8: U2.25@1844.99,1239.66 ccw(c1831.65,1252.99) 1850.51,1252.99 ccw(c1869.37,1252.99) U2.25@1856.04,1239.66 ; U2.25@1850.51,1205.59 1850.51,1274.14 1871.37,1295 v1(1905,1295) ; v1@1898.99,1288.99 ccw(c1884.48,1274.48) 1884.48,1295 ccw(c1884.48,1315.52) v1@1898.99,1301.01 ; v1@1950,1006.5 cw(c1950,985.98) 1964.51,1000.49 cw(c1979.02,1015) v1@1958.5,1015 ; v1(1950,1015) 1985,980 2015,980 2031.5,963.5 2268.96,963.5 2375.47,1070.02 2401.85,1070.02 2481.52,1149.68 U12.10@2595,1149.68
  Bottom Layer w8: v1(1905,1295) 1910,1300 1932.52,1300 ; v1@1911.72,1289.8 cw(c1932.52,1273.7) 1932.52,1300 ; v1@1942.34,1018.69 ccw(c1931.44,1023.96) 1940,1032.52 ; v1(1950,1015) 1950,1022.52 1940,1032.52 ; 1932.52,1300 1934.02,1298.5 1966.04,1298.5 2003,1261.54 2003,1143 1940,1080 1940,1032.52
AD0: J2.7 Rp1.1 U2.37 U10.3 | length 2655.2
  Top Layer w8: U2.37@2169.41,1367.01 2317.01,1367.01 2384,1434 2384,1534.91 2527.91,1678.82 U10.3@2595,1678.82 2632,1678.82 2693.18,1740 2770,1740 v1(2765,1745) ; U2.37@2203.48,1361.48 cw(c2216.81,1348.15) 2216.81,1367.01 cw(c2216.81,1385.87) U2.37@2203.48,1372.53 ; 2732.41,1740 ccw(c2732.41,1777.59) v1@2758.99,1751.01 ; Rp1.1@2737.24,275.43 2738.66,276.85 2738.66,330 J2.7@2866.18,457.52 ; 2751.72,1740 ccw(c2751.72,1758.28) v1@2764.65,1745.35
  Bottom Layer w8: v1@2765,1736.5 cw(c2765,1715.98) 2779.51,1730.49 cw(c2794.02,1745) v1@2773.5,1745 ; v1(2765,1745) 2781,1729 2781,609 2866.18,523.82 J2.7@2866.18,457.52 ; J2.7@2848.13,475.57 ccw(c2804.55,519.15) 2866.18,519.15 ccw(c2927.81,519.15) J2.7@2884.23,475.57 ; J2.7@2853.79,469.91 ccw(c2823.87,499.83) 2866.18,499.83 ccw(c2908.5,499.83) J2.7@2878.57,469.91
AD1: J2.8 Rp1.2 U2.36 U10.4 | length 2515.1
  Top Layer w8: U2.36@2169.41,1335.51 2310.97,1335.51 2402,1426.54 2402,1527.46 2527.77,1653.23 U10.4@2595,1653.23 2631.86,1653.23 2683.63,1705 v1(2745,1705) ; U2.36@2203.48,1329.99 cw(c2216.81,1316.65) 2216.81,1335.51 cw(c2216.81,1354.37) U2.36@2203.48,1341.04 ; Rp1.2@2705.75,275.43 2705.75,345.75 2766.18,406.18 J2.8@2766.18,457.52 ; v1@2738.99,1698.99 ccw(c2724.48,1684.48) 2724.48,1705 ccw(c2724.48,1725.52) v1@2738.99,1711.01
  Bottom Layer w8: v1@2745,1696.5 cw(c2745,1675.98) 2759.51,1690.49 cw(c2774.02,1705) v1@2753.5,1705 ; v1(2745,1705) 2763,1687 2763,624.54 2755,616.54 2755,609.54 2766.18,598.36 J2.8@2766.18,457.52 ; J2.8@2748.13,475.57 ccw(c2704.55,519.15) 2766.18,519.15 ccw(c2827.81,519.15) J2.8@2784.23,475.57 ; J2.8@2753.79,469.91 ccw(c2723.87,499.83) 2766.18,499.83 ccw(c2808.5,499.83) J2.8@2778.57,469.91
AD2: J2.9 Rp1.3 U2.35 U10.5 | length 2462.5
  Top Layer w8: U2.35@2169.41,1304.02 2304.93,1304.02 2420,1419.09 2420,1520 2527.64,1627.64 U10.5@2595,1627.64 2631.73,1627.64 2674.09,1670 v1(2725,1670) ; U2.35@2203.48,1298.49 cw(c2216.81,1285.16) 2216.81,1304.02 cw(c2216.81,1322.87) U2.35@2203.48,1309.54 ; J2.9@2666.18,457.52 2666.18,353.82 2674.25,345.75 Rp1.3@2674.25,275.43 ; v1@2718.99,1663.99 ccw(c2704.48,1649.48) 2704.48,1670 ccw(c2704.48,1690.52) v1@2718.99,1676.01
  Bottom Layer w8: J2.9@2648.13,475.57 ccw(c2604.55,519.15) 2666.18,519.15 ccw(c2727.81,519.15) J2.9@2684.23,475.57 ; J2.9@2653.79,469.91 ccw(c2623.87,499.83) 2666.18,499.83 ccw(c2708.5,499.83) J2.9@2678.57,469.91 ; J2.9@2666.18,457.52 2666.18,553.18 2745,632 2745,1650 v1(2725,1670) ; v1@2725,1661.5 cw(c2725,1640.98) 2739.51,1655.49 cw(c2754.02,1670) v1@2733.5,1670
AD3: J2.10 Rp1.4 U2.34 U10.6 | length 2597.3
  Top Layer w8: U2.34@2169.41,1272.52 2272.51,1272.52 2286,1286.02 2312.38,1286.02 2438,1411.63 2438,1512.54 2527.5,1602.05 U10.6@2595,1602.05 2631.59,1602.05 2664.54,1635 v1(2715,1635) ; U2.34@2203.48,1267 cw(c2216.81,1253.66) 2216.81,1272.52 cw(c2216.81,1291.38) U2.34@2203.48,1278.04 ; J2.10@2566.18,457.52 2566.18,388.82 2642.76,312.24 Rp1.4@2642.76,275.43 ; v1@2708.99,1628.99 ccw(c2694.48,1614.48) 2694.48,1635 ccw(c2694.48,1655.52) v1@2708.99,1641.01
  Bottom Layer w8: J2.10@2559.71,457.52 cw(c2601.21,457.52) 2571.86,486.86 ; J2.10@2566.18,457.52 2566.18,481.18 2725,640 2725,1633 2723,1635 v1(2715,1635) ; J2.10@2567.71,457.52 cw(c2628.52,457.52) 2585.52,500.52 ; J2.10@2575.71,457.52 cw(c2655.83,457.52) 2599.18,514.18 ; J2.10@2583.71,457.52 cw(c2683.15,457.52) 2612.83,527.83 ; J2.10@2591.71,457.52 cw(c2710.46,457.52) 2626.49,541.49
AD4: J2.11 Rp2.1 U2.33 U10.7 | length 2533.7
  Top Layer w8: U2.33@2102.48,1205.59 2137.83,1205.59 2171.24,1239 2264.44,1239 2293.46,1268.02 2319.84,1268.02 2456,1404.18 2456,1505.09 2527.37,1576.46 U10.7@2595,1576.46 2631.46,1576.46 2660,1605 v1(2695,1605) ; U2.33@2108,1200.07 cw(c2121.34,1186.73) 2121.34,1205.59 cw(c2121.34,1224.45) U2.33@2108,1211.11 ; J2.11@2466.18,457.52 2466.18,382.98 2532.24,316.91 Rp2.1@2532.24,275.43 ; v1@2688.99,1598.99 ccw(c2674.48,1584.48) 2674.48,1605 ccw(c2674.48,1625.52) v1@2688.99,1611.01
  Bottom Layer w8: J2.11@2466.18,457.52 2520.66,512 2571.46,512 2599.46,540 2599.54,540 2707,647.46 2707,1593 v1(2695,1605) ; J2.11@2466.18,475.05 ccw(c2466.18,517.36) 2496.1,487.44 ccw(c2526.02,457.52) J2.11@2483.71,457.52 ; J2.11@2466.18,483.05 ccw(c2466.18,544.68) 2509.76,501.1 ccw(c2553.34,457.52) J2.11@2491.71,457.52
AD5: J2.12 Rp2.2 U2.32 U10.8 | length 2713.2
  Top Layer w8: U2.32@2065.64,1171.35 cw(c2054.08,1159.02) 2070.98,1159.02 ; U2.32@2070.98,1205.59 2070.98,1159.02 ; U2.32@2076.33,1171.35 ccw(c2087.89,1159.02) 2070.98,1159.02 ; J2.12@2366.18,457.52 2500.75,322.95 Rp2.2@2500.75,275.43 ; v1@2668.78,1569.2 ccw(c2655.46,1556.78) 2655.46,1575 ; v1@2668.78,1580.8 cw(c2655.46,1593.22) 2655.46,1575 ; v1(2675,1575) 2655.46,1575 ; 2070.98,1159.02 2085,1145 2105,1145 2181,1221 2271.9,1221 2300.91,1250.02 2327.29,1250.02 2474,1396.72 2474,1497.63 2527.23,1550.87 U10.8@2595,1550.87 2631.32,1550.87 2655.46,1575
  Bottom Layer w8: J2.12@2366.18,457.52 2438.66,530 2564,530 2689,655 2689,1561 ; J2.12@2366.18,475.05 ccw(c2366.18,517.36) 2396.1,487.44 ccw(c2426.02,457.52) J2.12@2383.71,457.52 ; J2.12@2366.18,483.05 ccw(c2366.18,544.68) 2409.76,501.1 ccw(c2453.34,457.52) J2.12@2391.71,457.52 ; v1(2675,1575) 2689,1561 ; v1@2675.22,1566.5 cw(c2675.7,1547.7) 2689,1561 ; v1@2683.5,1574.78 ccw(c2702.3,1574.3) 2689,1561
AD6: J2.13 Rp2.3 U2.31 U10.9 | length 2902.5
  Top Layer w8: U2.31@2033.96,1171.52 cw(c2020.63,1158.19) 2039.49,1158.19 cw(c2058.35,1158.19) U2.31@2045.01,1171.52 ; U2.31@2039.49,1205.59 2039.49,1155.51 2070,1125 2110.46,1125 2188.46,1203 2279.35,1203 2308.37,1232.02 2334.75,1232.02 2492,1389.27 2492,1490.18 2527.1,1525.28 U10.9@2595,1525.28 2635.28,1525.28 ; J2.13@2266.18,457.52 2388.7,335 2445,335 2469.25,310.75 Rp2.3@2469.25,275.43 ; 2645.41,1535.41 cw(c2656.32,1524.5) v1@2659.88,1539.51 ; v1@2658.04,1531.73 ccw(c2652.44,1508.12) 2635.28,1525.28 ; v1(2660,1540) 2650,1540 2635.28,1525.28
  Bottom Layer w8: J2.13@2266.18,457.52 2356.66,548 2544,548 2671,675 2671,1529 v1(2660,1540) ; J2.13@2266.18,475.05 ccw(c2266.18,517.36) 2296.1,487.44 ccw(c2326.02,457.52) J2.13@2283.71,457.52 ; J2.13@2266.18,483.05 ccw(c2266.18,544.68) 2309.76,501.1 ccw(c2353.34,457.52) J2.13@2291.71,457.52 ; v1@2653.99,1533.99 cw(c2612.92,1492.92) 2671,1492.92 ; v1@2659.65,1539.65 cw(c2632.24,1512.24) 2671,1512.24 ; v1@2665.3,1545.3 cw(c2651.55,1531.55) 2671,1531.55
AD7: J2.14 Rp2.4 U2.30 U10.10 | length 2925
  Top Layer w8: U2.30@2002.47,1171.52 cw(c1989.13,1158.19) 2007.99,1158.19 cw(c2026.85,1158.19) U2.30@2013.52,1171.52 ; U2.30@2007.99,1205.59 2007.99,1152.01 2053,1107 2117.91,1107 2195.91,1185 2286.81,1185 2315.83,1214.02 2342.21,1214.02 2510,1381.81 2510,1475 2534.68,1499.68 U10.10@2595,1499.68 2631.19,1499.68 v1(2632.09,1498.78) ; J2.14@2166.18,457.52 2348.27,275.43 Rp2.4@2437.76,275.43 ; U10.10@2609.38,1499.68 cw(c2609.38,1476.06) v1@2626.08,1492.77 ; U10.10@2613.77,1499.68 ccw(c2613.77,1517.1) v1@2626.08,1504.79
  Bottom Layer w8: J2.14@2166.18,457.52 2274.66,566 2536.54,566 2653,682.46 2653,1484.28 ; J2.14@2166.18,475.05 ccw(c2166.18,517.36) 2196.1,487.44 ccw(c2226.02,457.52) J2.14@2183.71,457.52 ; J2.14@2166.18,483.05 ccw(c2166.18,544.68) 2209.76,501.1 ccw(c2253.34,457.52) J2.14@2191.71,457.52 ; v1(2632.09,1498.78) 2632.09,1505.18 2653,1484.28 ; v1@2633.57,1490.4 cw(c2637.4,1468.67) 2653,1484.28
ADDR0: U4.131 U5.20 | length 1126.6
  Top Layer w8: v1@3705,2338.5 3748.96,2338.5 3808.36,2397.91 3883.63,2397.91 U5.20@3885.31,2396.22 ; v1@3711.01,2333.99 cw(c3721.9,2323.1) 3721.9,2338.5 ; v1@3711.01,2346.01 ccw(c3729.14,2364.14) 3729.14,2338.5 ; 3724.42,1759.68 ccw(c3744.68,1759.68) v1@3730.35,1745.35 ; 3724.42,1779 ccw(c3764,1779) v1@3736.01,1751.01 ; U4.131@3724.42,1873.13 3724.42,1750.58 v1(3730,1745) ; 3851.06,2397.91 cw(c3851.06,2387.55) U5.20@3858.38,2394.87
  Bottom Layer w8: 3689.43,2322.93 ccw(c3672.36,2340) v1@3696.5,2340 ; 3693.05,2326.55 cw(c3705,2314.6) v1@3705,2331.5 ; v1@3705,2335 v1(3705,2340) ; v1@3705,2338.5 3661,2294.5 3661,1819 3730,1750 v1(3730,1745) ; 3711.95,1768.05 cw(c3688.91,1745) v1@3721.5,1745
ADDR1: U4.132 U5.19 | length 1149.6
  Top Layer w8: v1(3690,1750) 3704.73,1764.73 U4.132@3704.73,1873.13 ; v1@3690,1758.5 ccw(c3690,1779.02) 3704.51,1764.51 ccw(c3719.02,1750) v1@3698.5,1750 ; v1(3735,2370) 3735,2365 3730,2370 3755,2370 ; v1@3741.12,2364.1 cw(c3755,2350.72) 3755,2370 ; v1@3741.12,2375.9 ccw(c3755,2389.28) 3755,2370 ; U5.19@3885.31,2415.91 3800.9,2415.91 3755,2370
  Bottom Layer w8: v1@3681.5,1750 ccw(c3660.98,1750) 3675.49,1764.51 ccw(c3690,1779.02) v1@3690,1758.5 ; v1(3690,1750) 3643,1797 3643,2315.48 3697.07,2369.54 3730.46,2369.54 3735,2365 v1(3735,2370) ; 3713.38,2369.54 ccw(c3713.38,2391.62) v1@3728.99,2376.01 ; 3715.58,2369.54 cw(c3715.58,2350.58) v1@3728.99,2363.99
ADDR2: U4.133 U5.18 | length 1156.9
  Top Layer w8: v1(3645,1750) 3685.05,1790.05 U4.133@3685.05,1873.13 ; v1@3645,1758.5 ccw(c3645,1779.02) 3659.51,1764.51 ccw(c3674.02,1750) v1@3653.5,1750 ; v1(3755,2410) 3780.59,2435.59 U5.18@3885.31,2435.59 ; v1@3755,2418.5 ccw(c3755,2439.02) 3769.51,2424.51 ccw(c3784.02,2410) v1@3763.5,2410
  Bottom Layer w8: v1@3636.5,1750 ccw(c3615.98,1750) 3630.49,1764.51 ccw(c3645,1779.02) v1@3645,1758.5 ; v1(3645,1750) 3625,1770 3625,2322.93 3712.07,2410 v1(3755,2410) ; v1@3748.99,2403.99 ccw(c3734.48,2389.48) 3734.48,2410 ccw(c3734.48,2430.52) v1@3748.99,2416.01
ADDR3: U4.134 U5.17 | length 1207.7
  Top Layer w8: v1(3605,1750) 3605,1760 3665.36,1820.36 U4.134@3665.36,1873.13 ; v1@3605.5,1750 cw(c3630.85,1750) 3612.92,1767.92 ; v1@3613.5,1750 cw(c3658.16,1750) 3626.58,1781.58 ; v1@3825,2461.5 cw(c3825,2440.98) 3839.51,2455.49 cw(c3854.02,2470) v1@3833.5,2470 ; v1(3825,2470) 3839.73,2455.28 U5.17@3869.73,2455.28
  Bottom Layer w8: v1@3598.99,1756.01 ccw(c3584.48,1770.52) 3605,1770.52 ccw(c3625.52,1770.52) v1@3611.01,1756.01 ; v1(3605,1750) 3605,2328.39 3713.11,2436.5 3751.5,2436.5 3785,2470 v1(3825,2470) ; v1@3818.99,2463.99 ccw(c3804.48,2449.48) 3804.48,2470 ccw(c3804.48,2490.52) v1@3818.99,2476.01
ADDR4: U4.118 U5.16 | length 874.6
  Top Layer w10: U4.118@3980.32,1873.13 3980.32,1972.91 3949,2004.24 3949,2056.22 4150,2257.22 4150,2355 4250.27,2455.28 U5.16@4405,2455.28
ADDR5: U4.117 U5.15 | length 843.2
  Top Layer w8: U4.117@4000.01,1873.13 4000.01,1980.1 3968,2012.11 3968,2048.35 4169,2249.35 4169,2347.13 4257.46,2435.59 U5.15@4405,2435.59
ADDR6: U4.114 U5.14 | length 769.1
  Top Layer w8: U4.114@4059.06,1873.13 4059.06,1934.06 4130,2005 4130,2184.89 4187,2241.89 4187,2339.67 4263.23,2415.91 U5.14@4405,2415.91
ADDR7: U4.113 U5.13 | length 737.9
  Top Layer w8: U4.113@4078.75,1873.13 4078.75,1928.29 4148,1997.54 4148,2177.44 4205,2234.44 4205,2332.22 4269,2396.22 U5.13@4405,2396.22
ADDR8: U4.105 U5.3 | length 659.1
  Top Layer w8: U4.105@4242.13,1729.43 4305.34,1729.43 4336,1760.09 4336,1929.91 4274,1991.91 4274,2125.25 4348.12,2199.37 U5.3@4405,2199.37
ADDR9: U4.104 U5.2 | length 659.1
  Top Layer w8: U4.104@4242.13,1709.75 4311.11,1709.75 4354,1752.63 4354,1937.37 4292,1999.37 4292,2117.79 4353.89,2179.68 U5.2@4405,2179.68
ADDR10: U4.121 U5.31 | length 397.1
  Top Layer w8: U5.31@3885.31,2179.68 3935.31,2179.68 3950,2165 3950,2135 3894,2079 3894,1981.46 3921.27,1954.19 U4.121@3921.27,1873.13
ADDR11: U4.103 U5.1 | length 659.1
  Top Layer w8: U4.103@4242.13,1690.06 4316.89,1690.06 4372,1745.18 4372,1944.82 4310,2006.82 4310,2110.33 4359.67,2160 U5.1@4405,2160
ADDR12: U4.112 U5.12 | length 706.7
  Top Layer w8: U4.112@4098.43,1873.13 4098.43,1922.52 4166,1990.09 4166,2169.98 4223,2226.98 4223,2324.76 4274.77,2376.53 U5.12@4405,2376.53
ADDR13: U4.106 U5.4 | length 666.7
  Top Layer w8: U4.106@4245.17,1748.79 4299.24,1748.79 4318,1767.54 4318,1922.46 4256,1984.46 4256,2132.7 4313,2189.7 4313,2207.54 4324.51,2219.05 U5.4@4405,2219.05
ADDR14: U4.111 U5.11 | length 675.5
  Top Layer w8: U4.111@4118.12,1873.13 4118.12,1916.75 4184,1982.63 4184,2162.53 4241,2219.53 4241,2317.31 4280.54,2356.85 U5.11@4405,2356.85
ADDR15: U4.108 U5.7 | length 635.1
  Top Layer w8: U4.108@4242.13,1788.49 4242.13,1937.87 4220,1960 4220,2147.61 4277,2204.61 4277,2252 4303.11,2278.11 U5.7@4405,2278.11
ADDR16: U4.110 U5.10 | length 644.2
  Top Layer w8: U4.110@4137.8,1873.13 4137.8,1910.98 4202,1975.18 4202,2155.07 4259,2212.07 4259,2309.85 4286.31,2337.16 U5.10@4405,2337.16
ALE: U2.27 U11.7 | length 779.2
  Top Layer w8: U2.27@1907.98,1171.52 cw(c1894.65,1158.19) 1913.5,1158.19 cw(c1932.36,1158.19) U2.27@1919.03,1171.52 ; U2.27@1913.5,1205.59 1913.5,1014.02 1982.02,945.5 2173.59,945.5 2277.59,841.5 U11.7@2400,841.46 U11.7@2400,841.46
AX: E1.1 R39.1 U4.94 | length 1918.3
  Top Layer w8: U4.94@4242.13,1512.9 4317.9,1512.9 4408,1603 4478,1603 v1(4525,1650) ; v1@4516.5,1650 cw(c4495.98,1650) 4510.49,1635.49 cw(c4525,1620.98) v1@4525,1641.5 ; v1@4698.99,2126.01 ccw(c4684.48,2140.52) 4705,2140.52 ccw(c4725.52,2140.52) v1@4711.01,2126.01 ; v1(4705,2120) 4705,2240 R39.1@4715,2250 4978.43,2250 E1.1@5123.43,2395 ; 4705,2194.3 cw(c4765.7,2194.3) R39.1@4722.78,2237.22 ; 4705,2213.62 cw(c4746.38,2213.62) R39.1@4717.12,2242.88 ; R39.1@4705,2232.93 cw(c4727.07,2232.93) R39.1@4711.46,2248.54 ; R39.1@4722.78,2242.22 cw(c4741.56,2223.44) 4741.56,2250 cw(c4741.56,2276.56) R39.1@4722.78,2257.78 ; E1.1@5097.9,2395 cw(c5036.27,2395) 5079.85,2351.42 cw(c5123.43,2307.84) E1.1@5123.43,2369.47 ; E1.1@5105.9,2395 cw(c5063.58,2395) 5093.5,2365.08 cw(c5123.43,2335.16) E1.1@5123.43,2377.47
  Bottom Layer w8: v1(4525,1650) 4688.5,1813.5 4688.5,1866.5 4705,1883 v1(4705,2120) ; v1@4525,1658.5 ccw(c4525,1679.02) 4539.51,1664.51 ccw(c4554.02,1650) v1@4533.5,1650 ; v1@4698.99,2113.99 cw(c4684.48,2099.48) 4705,2099.48 cw(c4725.52,2099.48) v1@4711.01,2113.99
BX: E1.2 R38.1 U4.95 | length 1750.6
  Top Layer w8: U4.95@4242.13,1532.58 4292.58,1532.58 v1(4325,1565) ; v1@4316.5,1565 cw(c4295.98,1565) 4310.49,1550.49 cw(c4325,1535.98) v1@4325,1556.5 ; R38.1@4715,2354 cw(c4715,2315.37) 4742.31,2342.69 ; R38.1@4715,2362 cw(c4715,2342.69) R38.1@4728.66,2356.34 ; R38.1@4715.79,2385.97 ccw(c4718.01,2416.98) 4740,2395 ; R38.1@4726,2365 ccw(c4740.49,2365) 4730.24,2354.76 ; R38.1@4726,2375 cw(c4740.49,2375) 4730.24,2385.24 ; v1@4743.99,2316.01 ccw(c4729.48,2330.52) 4750,2330.52 ccw(c4770.52,2330.52) v1@4756.01,2316.01 ; v1(4750,2310) 4750,2335 R38.1@4715,2370 4740,2395 ; E1.2@4908.52,2376.95 ccw(c4864.95,2333.37) 4864.95,2395 ccw(c4864.95,2456.63) E1.2@4908.52,2413.05 ; E1.2@4914.18,2382.61 ccw(c4884.26,2352.68) 4884.26,2395 ccw(c4884.26,2437.32) E1.2@4914.18,2407.39 ; E1.2@4926.57,2395 4740,2395
  Bottom Layer w8: v1(4325,1565) 4385,1625 4450,1625 4670.5,1845.5 4670.5,2135.5 4745,2210 4745,2305 v1(4750,2310) ; v1@4325,1573.5 ccw(c4325,1594.02) 4339.51,1579.51 ccw(c4354.02,1565) v1@4333.5,1565 ; 4745,2277.41 cw(c4782.59,2277.41) v1@4756.01,2303.99 ; 4745,2296.72 cw(c4763.28,2296.72) v1@4750.35,2309.65
CD: R65.1 T1.9 U4.48 | length 869.5
  Top Layer w8: v1@3650,1106.5 cw(c3650,1085.98) 3664.51,1100.49 cw(c3679.02,1115) v1@3658.5,1115 ; v1(3650,1115) 3685.05,1079.95 U4.48@3685.05,1014.87 ; T1.9@3783.24,624.63 ccw(c3766.55,641.33) 3790.16,641.33 ccw(c3813.77,641.33) T1.9@3797.07,624.63 ; v1@3783.99,663.99 cw(c3769.1,649.1) 3790.16,649.1 ; v1(3790,670) 3790.16,669.84 T1.9@3790.16,600 ; 3790.16,649.86 cw(c3810.14,649.86) v1@3796.01,663.99
  Bottom Layer w8: 3645,1082.41 cw(c3682.59,1082.41) v1@3656.01,1108.99 ; 3645,1101.72 cw(c3663.28,1101.72) v1@3650.35,1114.65 ; v1(3650,1115) 3645,1110 3645,815 v1(3790,670) ; v1@3781.5,670 ccw(c3760.98,670) 3775.49,684.51 ccw(c3790,699.02) v1@3790,678.5